# Altium PCB Button_PCB.PcbDoc
Units mm, origin at the board's own origin, x right, y up, seen from the top; angles counter-clockwise.
Board outline 35 x 40 mm, 2 copper layers (Top Layer, Bottom Layer); 38 components, 28 nets, 162 pads, 26 vias.
Unrouted connection lines stored in the file: 7.
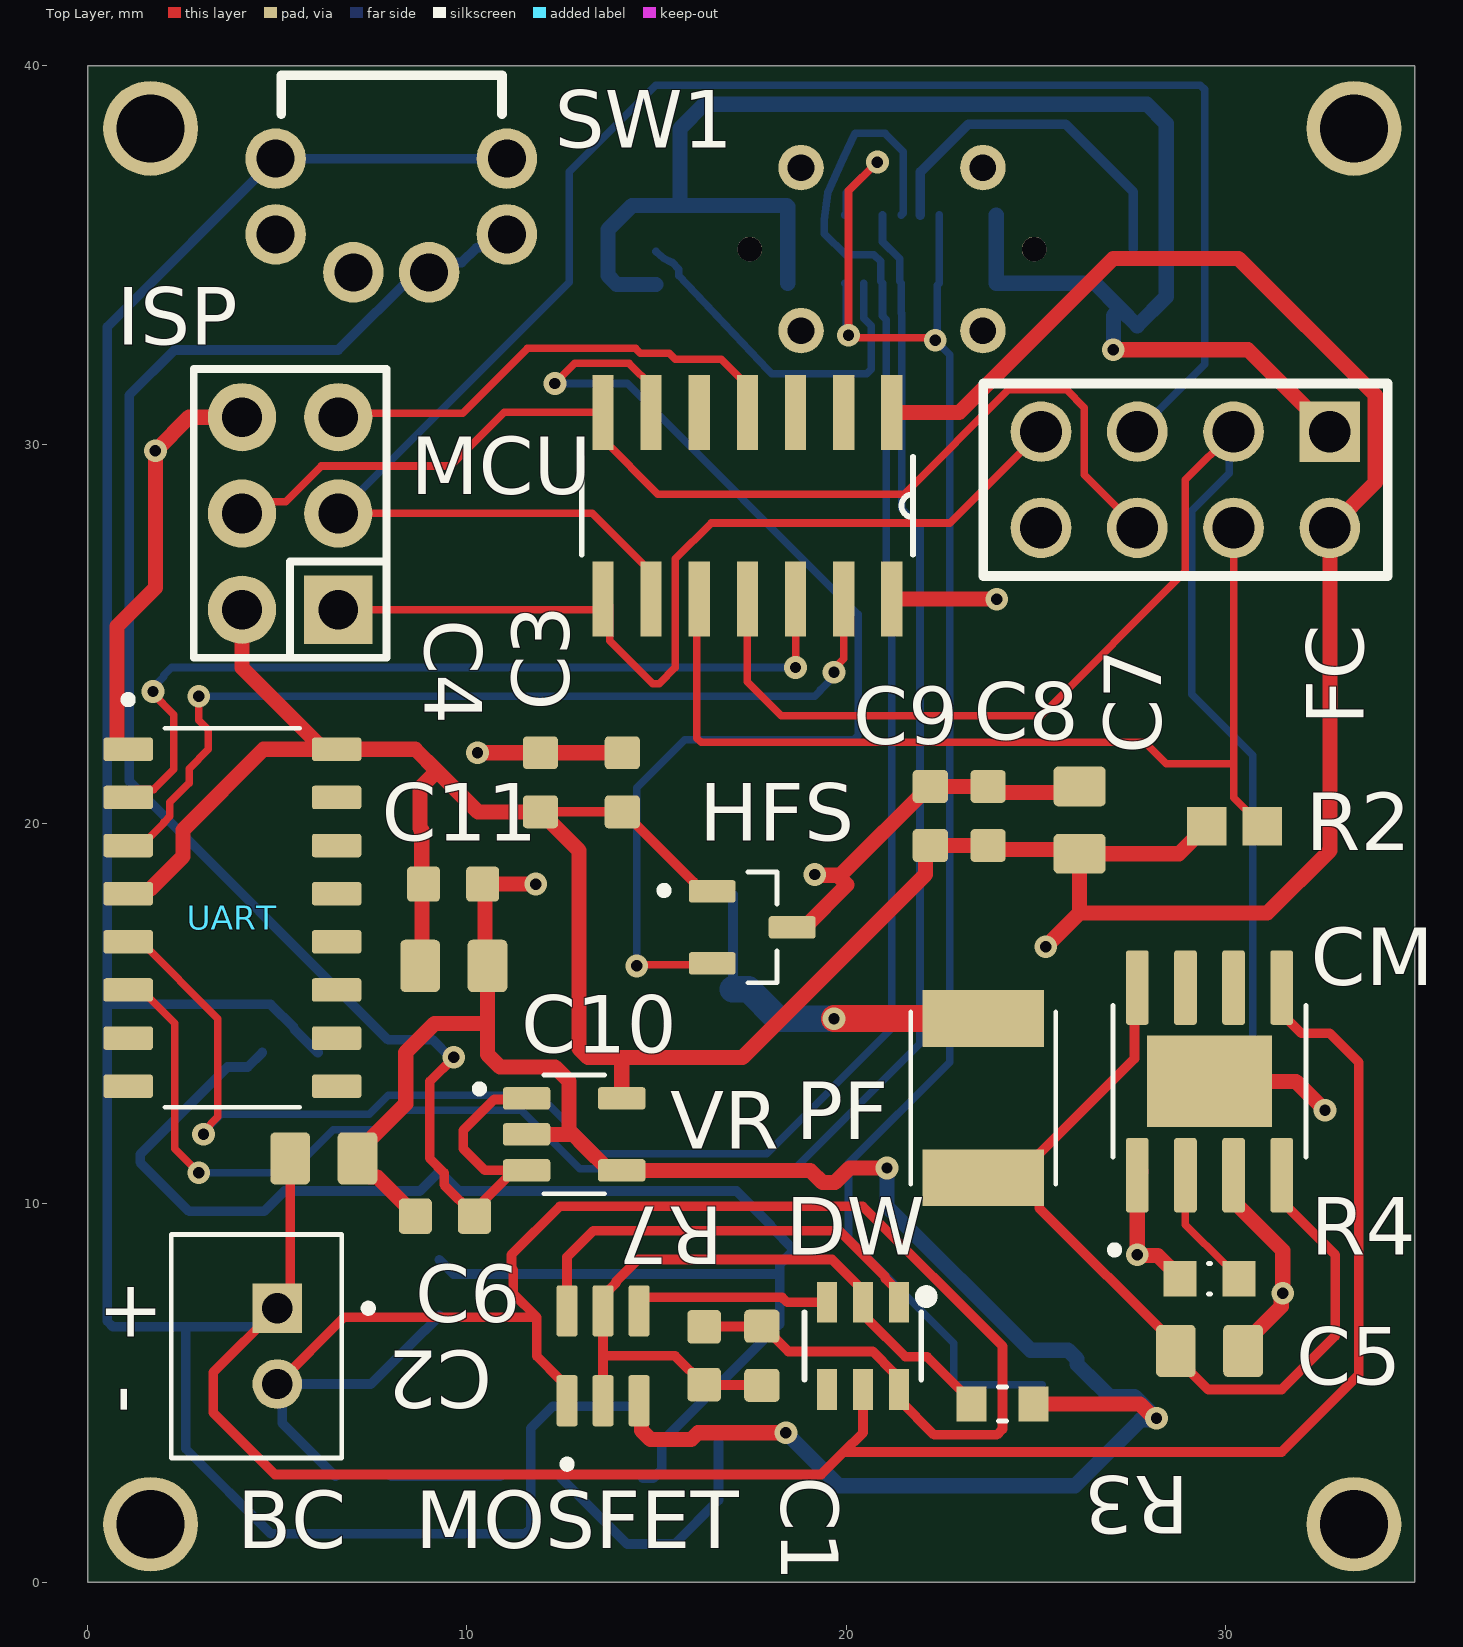
[diagram p0: Top Layer view]
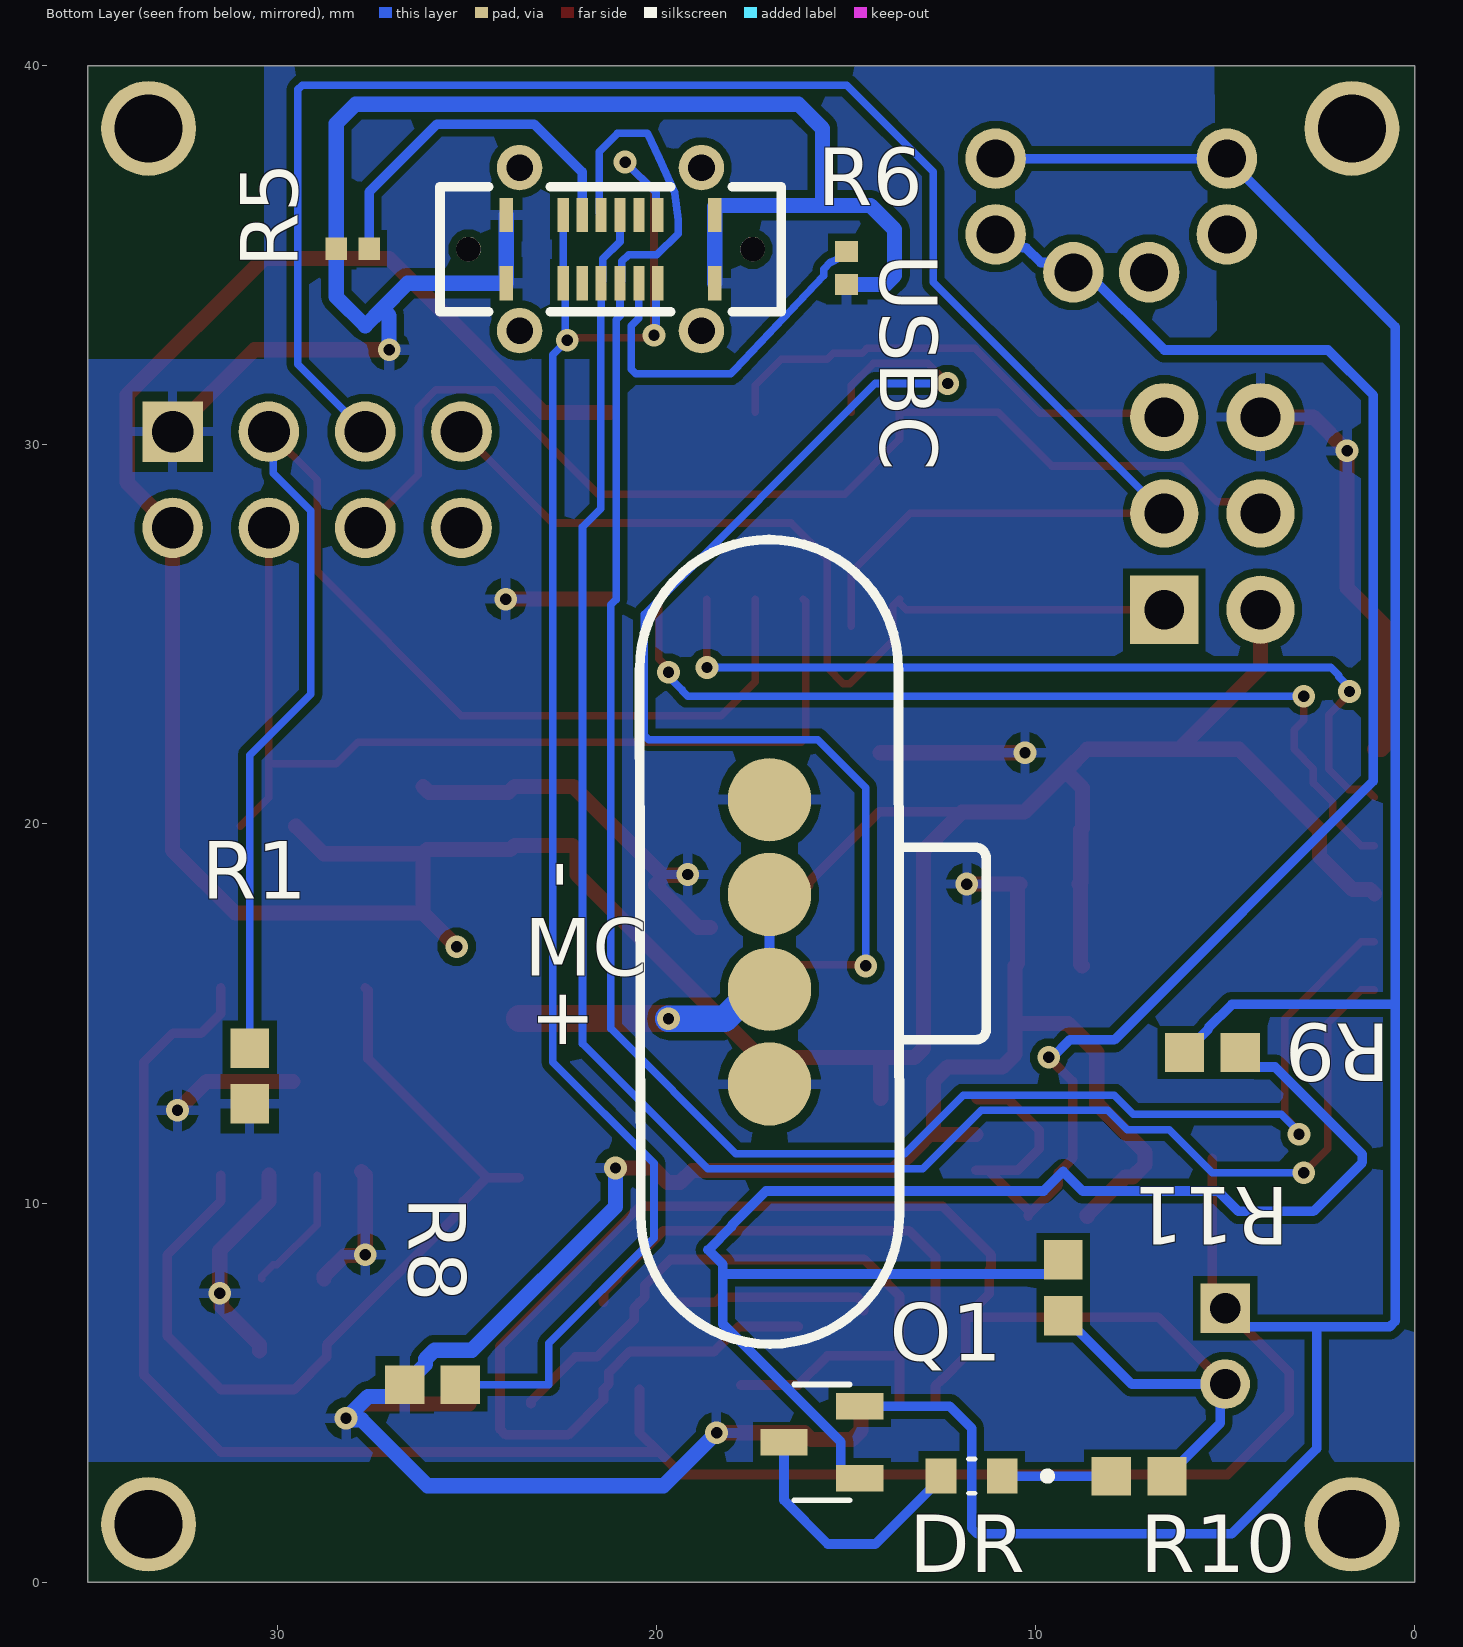
[diagram p1: Bottom Layer view, seen from below]
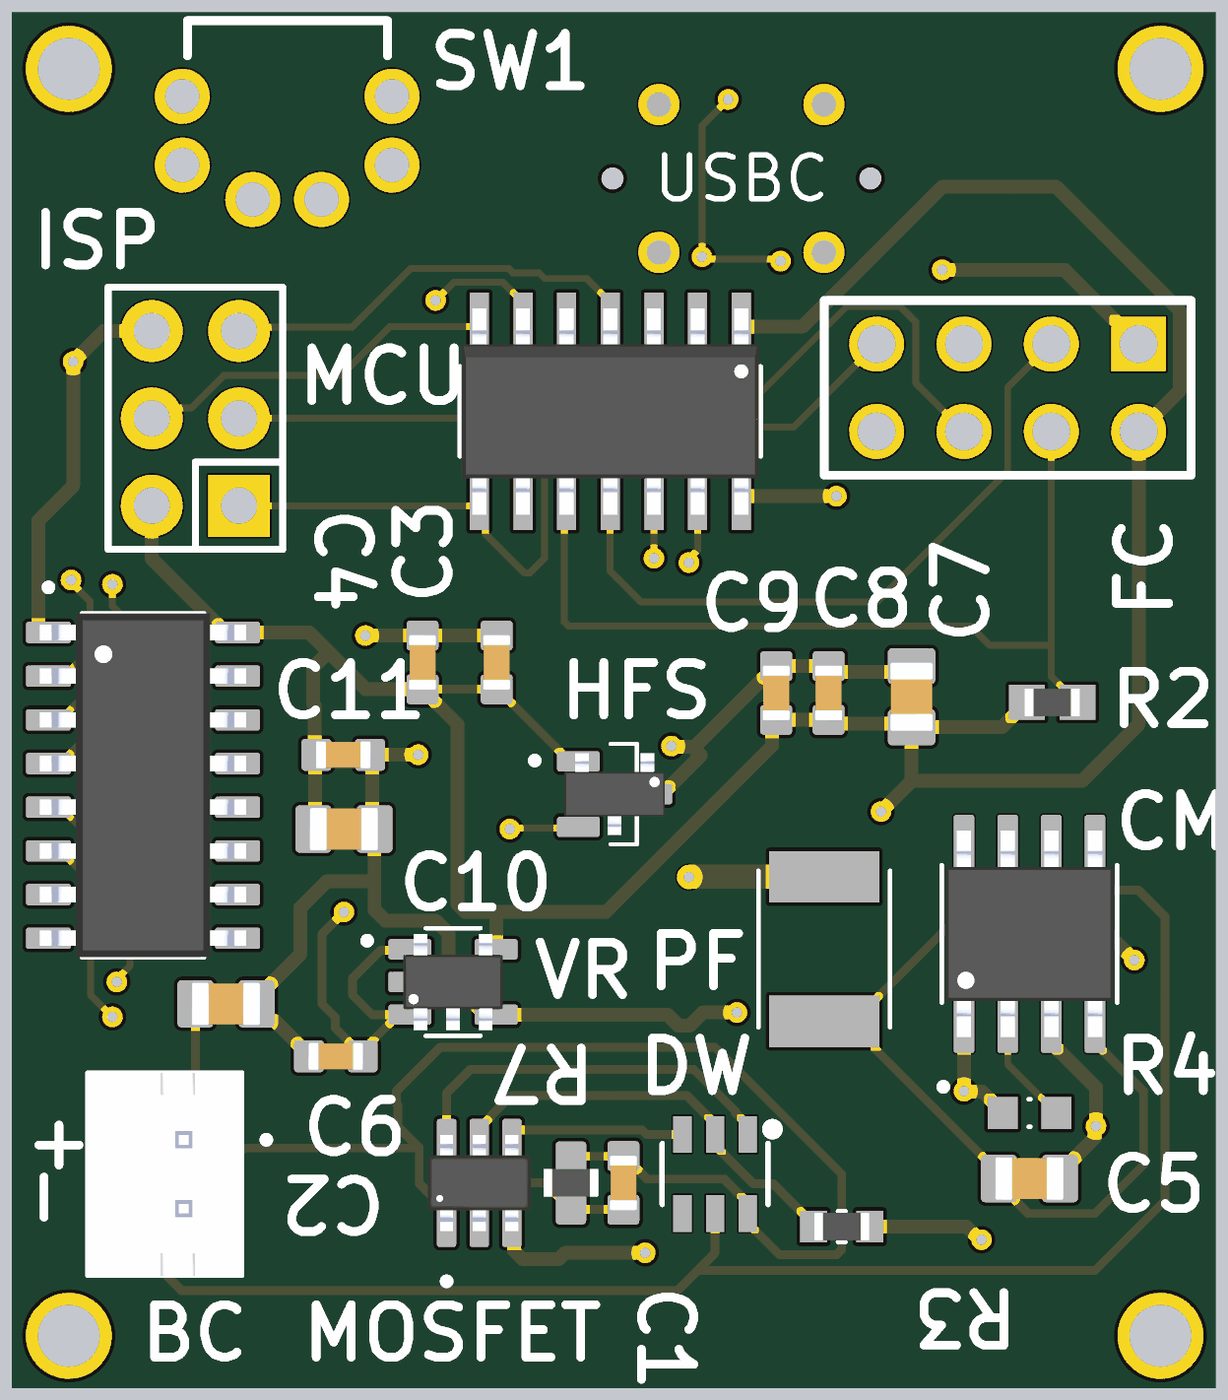
[diagram p2: 3D render of the assembled board from above, using the file's embedded part models]
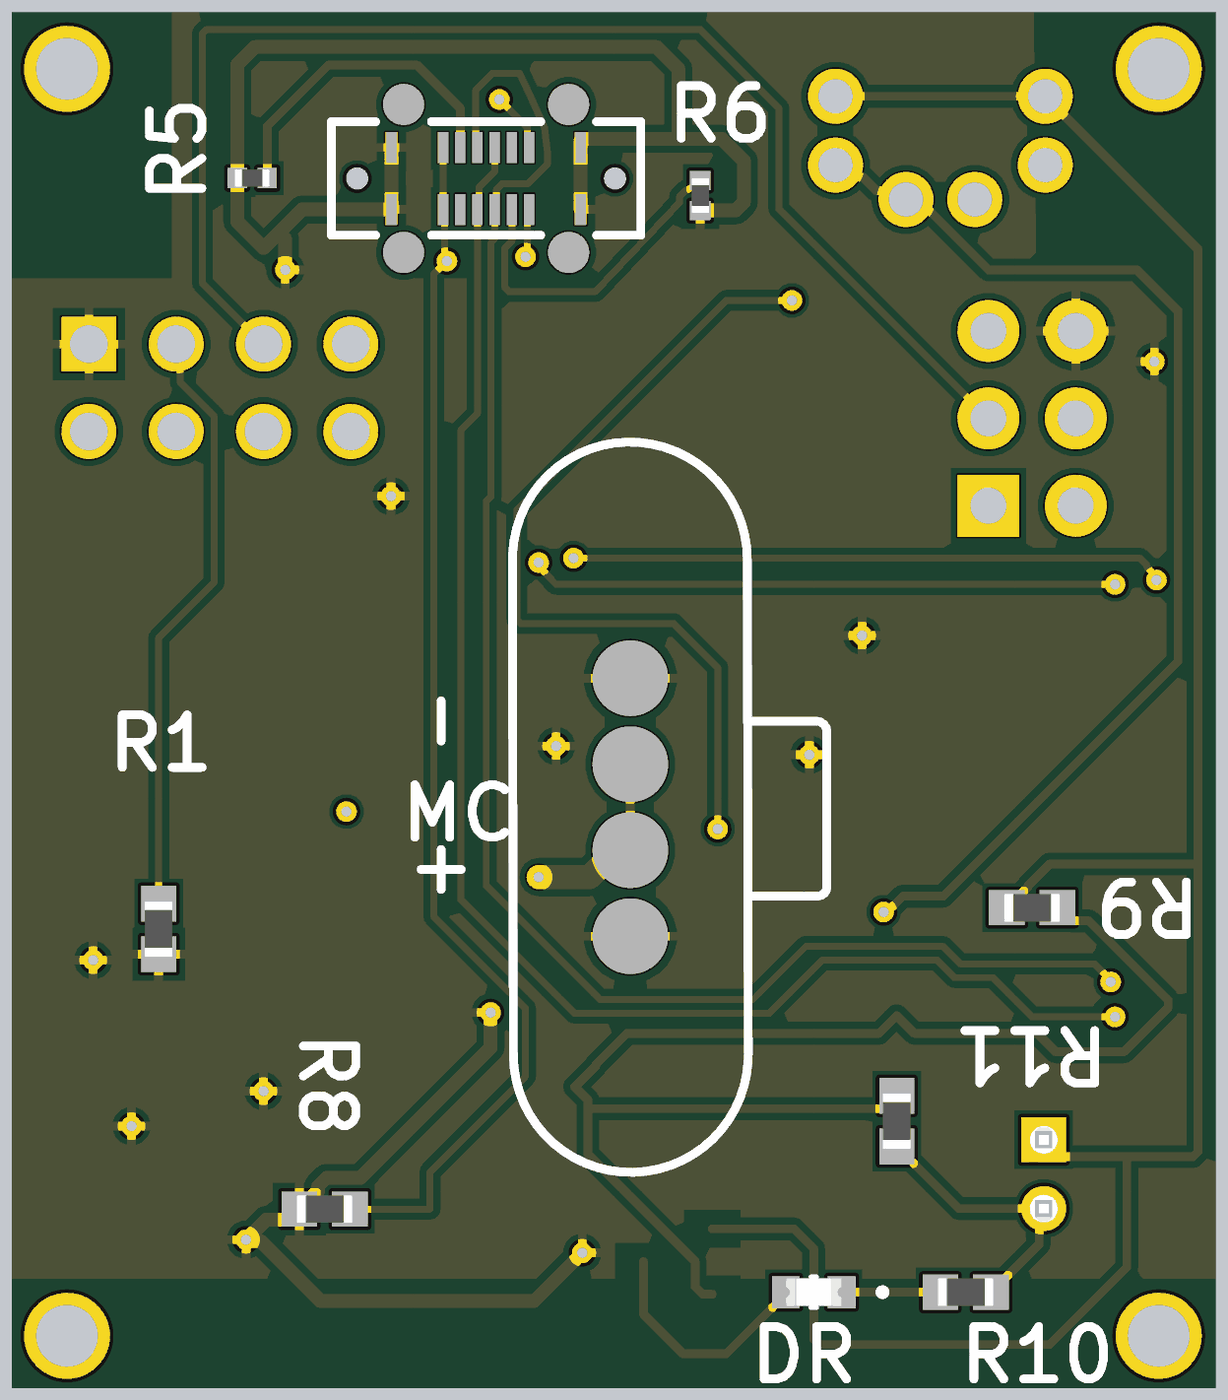
[diagram p3: 3D render of the assembled board from below, using the file's embedded part models]

## Layer stack, top to bottom
Top Solder: solder mask 0.0102, Solder Resist, Dk 3.5
Top Layer: signal copper 0.0356
Dielectric 1: dielectric 0.32, FR-4, Dk 4.8
Bottom Layer: signal copper 0.0356
Bottom Solder: solder mask 0.0102, Solder Resist, Dk 3.5

## Board outline
0,0 35,0 35,40 0,40

## Design rules (kind name [scope] priority, off if disabled: settings)
Clearance [All] p1: gap=0.2 ignorepadtopadclearanceinfootprint=TRUE
HoleSize [All] p1: absolutevalues=TRUE maxlimit=2.54 minlimit=0.25 maxpercent=80.000 minpercent=20.000
MinimumSolderMaskSliver [All] p1: minsoldermaskwidth=0.1
PolygonConnect [All] p1: connectstyle=Relief reliefconductorwidth=0.254 reliefentries=4 polygonreliefangle="90 Angle" airgapwidth=0.254
RoutingVias [All] p1: holewidth=0.711 width=1.27 viastyle="Through Hole" minholewidth=0.711 minwidth=1.27 maxholewidth=0.711 maxwidth=1.27
SilkToSolderMaskClearance [IsPad] p1: minsilkscreentomaskgap=0.15 clearancetoexposedcopper=TRUE
SolderMaskExpansion [All] p1: expansion=0.102 istentingtop=FALSE
SupplyNets "Schematic Supply Nets" [InNet('GND')] p1: voltage=0.000
Width Width_3 [InNetClass('3.3V')] p1: maxlimit=1 minlimit=0.2 preferedwidth=0.4 minimp=50.000000 maximp=50.000000 favimp=50.000000
Width Width_2 [InNetClass('GND')] p2: maxlimit=0.8 minlimit=0.25 preferedwidth=0.4 minimp=50.000000 maximp=50.000000 favimp=50.000000
Width [InNetClass('HPW')] p3: maxlimit=1.8 minlimit=0.4 preferedwidth=0.7 minimp=50.000000 maximp=50.000000 favimp=50.000000
Width Width_1 [InNetClass('SIG')] p4: maxlimit=0.3 minlimit=0.15 preferedwidth=0.2 minimp=50.000000 maximp=50.000000 favimp=50.000000
27 further rules are at their usual default settings.

## Classes and differential pairs
net class HIGHPW: B+ B- C+ "VCC TP"
net class GND: GND
net class 3.3V: 3.3V
net class SIG: CC2 CE CSN "HFS OUT" MISO MOSI "PROG Pin" RESET RX SCK TX UD+ UD- VBUS

## Components (designator, comment, footprint, x,y, rotation, side; value= is the part's Value field where it differs from the comment)
BC "B2B-PH-K-S(LF)(SN)" JST_B2B-PH-K-S(LF)(SN) 4.445,6.223 r90 top locked
C1 "CL10B104KB8NNNC" CAPC1608X90N 17.78,5.969 r90 top
C2 "CL10B104KB8NNNC" CAPC1608X90N 9.416,9.652 r180 top
C3 "CL10B104KB8NNNC" CAPC1608X90N 14.097,21.1 r90 top
C4 "CL10B104KB8NNNC" CAPC1608X90N 11.938,21.1 r270 top
C5 "CL21A106KPFNNNE" CAPC2012X135N 29.59,6.096 r0 top
C6 "CL21A106KPFNNNE" CAPC2012X135N 6.223,11.176 r0 top
C7 "CL21A106KPFNNNE" CAPC2012X135N 26.162,20.103 r90 top
C8 "CL10B104KB8NNNC" CAPC1608X90N 23.749,20.211 r90 top
C9 "CL10B104KB8NNNC" CAPC1608X90N 22.225,20.211 r90 top
C10 "CL21A106KPFNNNE" CAPC2012X135N 9.653,16.256 r0 top
C11 "CL10B104KB8NNNC" CAPC1608X90N 9.634,18.415 r0 top
CM "TP4056" SOP127P600X175-9N 29.591,13.208 r90 top
DR "LTST-C190KRKT" LEDC1608X35N 11.684,2.794 r0 bottom
DW "DW01A_C2927799" SOT-23-6_L2.9-W1.6-P0.95-LS2.8-BL 20.217,6.569 r180 top
FC "2.54-2*4" HDR-TH_8P-P2.54-V-F-R2-C4-S2.54 28.956,29.083 r180 top
HFS "TMAG5231B1DQDBZR" SOT95P237X112-3N 17.526,17.272 r0 top locked
ISP "Header-Male-2.54_2x3" HDR-TH_6P-P2.54-V-M-R2-C3-S2.54-1 5.334,28.194 r90 top
MC "YZ92015035T-04025-01" CONN-SMD_4P-P2.50_YZ92015035T-04025-01 15.875,16.891 r90 bottom
MCU "ATTINY84A-SSUR" SOIC127P600X175-14N 17.399,28.397 r270 top
MOSFET "8205A" SOT95P285X140-6N 13.589,5.969 r90 top
PF "MF-MSMF110-2" FUSER_MF-MSMF110-2 23.622,12.768 r90 top
Q1 "SS8550_C8542" SOT-23-3_L2.9-W1.3-P1.90-LS2.4-BR 446.234,425.247 r180 bottom
R1 "RC0603FR-07100KL" RESC1607X60N 30.734,13.353 r90 bottom
R2 "RC0603FR-0710KL" RESC1607X60N 30.253,19.939 r0 top
R3 "RC0603FR-071K1L" RESC1608X55N#1 24.13,4.699 r180 top
R4 "RC0603FR-071K1L" RESC1608X55N#2 29.591,8.001 r0 top
R5 "0402WGF5101TCE" RESC1005X40N 28.013,35.179 r180 bottom
R6 "0402WGF5101TCE" RESC1005X40N 14.986,34.671 r270 bottom
R7 "SMD-RES-2.7K-1%-1/10W(0603)" R0603 16.256,5.969 r180 top
R8 "RC0603FR-07100KL" RESC1607X60N 25.908,5.207 r180 bottom
R9 "RC0603FR-0722KL" RESC1607X60N 5.334,13.97 r0 bottom
R10 "RC0603FR-071K5L" RESC1607X60N 7.266,2.794 r180 bottom
R11 "RC0603FR-07100KL" RESC1607X60N 9.271,7.765 r270 bottom
SW1 "XKB5858-Z-E" SW-TH_XKB5858-Z-E 8.001,39.37 r0 top
UART "CH340C" SOIC127P600X180-16N 3.81,17.526 r0 top
USBC "GT-USB-7055BB" USB-C-TH_GT-USB-7055BB 21.213,35.168 r180 bottom
VR "TPS78233DDCT" SOT95P280X110-5N 12.827,11.811 r0 top

## Footprints (in the part's own frame and the unit in brackets; to place one, negate y for a bottom-side part, rotate by r counter-clockwise, add the part's x,y. Pads: shape width x height; smd on the part's side, far side on the other; paste and mask are expansions set on the pad)
CAPC1608X90N [mm]
  rrect25% 0.87x0.93 smd: 1(-0.78,0) 2(0.78,0)
  body extent -0.8,-0.4 0.8,0.4, height 0.9
CAPC2012X135N [mm]
  rrect25% 1.05x1.38 smd: 1(-0.888,0) 2(0.888,0)
  body extent -1,-0.63 1,0.63, height 1.35
CONN-SMD_4P-P2.50_YZ92015035T-04025-01 [mm]
  round 2.2 smd paste+0 mask+0.05: 1(-3.75,1.143) 2(-1.25,1.143) 3(1.25,1.143) 4(3.75,1.143)
  silkscreen extent -10.61,-4.57 10.61,4.57
FUSER_MF-MSMF110-2 [mm]
  rect 1.5x3.2 smd: 1(-2.1,0) 2(2.1,0)
  silkscreen extent -2.28,-1.91 2.27,1.91
HDR-TH_6P-P2.54-V-M-R2-C3-S2.54-1 [mm]
  rect 1.8x1.8 hole 1.05 paste-2539.97 mask+0.051: 1(-2.54,-1.27)
  round 1.8 hole 1.05 paste-2539.97 mask+0.051: 2(-2.54,1.27) 3(0,-1.27) 4(0,1.27) 5(2.54,-1.27) 6(2.54,1.27)
  silkscreen extent -3.81,-2.54 3.81,2.54
HDR-TH_8P-P2.54-V-F-R2-C4-S2.54 [mm]
  rect 1.6x1.6 hole 1.1 paste-2539.97 mask+0.051: 1(-3.81,-1.27)
  round 1.6 hole 1.1 paste-2539.97 mask+0.051: 2(-3.81,1.27) 3(-1.27,-1.27) 4(-1.27,1.27) 5(1.27,-1.27) 6(1.27,1.27) 7(3.81,-1.27) 8(3.81,1.27)
  silkscreen extent -5.33,-2.54 5.33,2.54
JST_B2B-PH-K-S(LF)(SN) [mm]
  rect 1.308x1.308 / inner round 1.308 / far side rect 1.308x1.308 hole 0.8: 1(1,-0.55)
  round 1.308 hole 0.8: 2(-1,-0.55)
  silkscreen extent -2.95,-3.05 2.95,2.25, body extent -2.95,-2.25 2.95,2.25, height 6
LEDC1608X35N [mm]
  rect 0.81x0.93 smd: A(0.81,0) C(-0.81,0)
  silkscreen extent -2.1,-0.45 0.09,0.45, body extent -0.8,-0.4 0.8,0.4, height 0.8
R0603 [mil]
  rrect25% 35x35 smd: 1(0,30) 2(0,-30)
  body extent -31,-16 31,16, height 22
RESC1005X40N [mm]
  rect 0.56x0.6 smd: 1(-0.435,0) 2(0.435,0)
  body extent -0.5,-0.25 0.5,0.25, height 0.35
RESC1607X60N [mm]
  rect 1.04x1.02 smd: 1(-0.735,0) 2(0.735,0)
  body extent -0.8,-0.4 0.8,0.4, height 0.55
RESC1608X55N#1 [mm]
  rect 0.79x0.93 smd: 1(-0.82,0) 2(0.82,0)
  silkscreen extent -0.11,-0.45 0.11,0.45, body extent -0.8,-0.4 0.8,0.4, height 0.55
RESC1608X55N#2 [mm]
  rect 0.87x0.93 smd paste+0 mask+0.102: 1(-0.78,0) 2(0.78,0)
  silkscreen extent -0.02,-0.4 0.02,0.4
SOIC127P600X175-14N [mil]
  rect 78x22 smd: 1(-97,150) 2(-97,100) 3(-97,50) 4(-97,0) 5(-97,-50) 6(-97,-100) 7(-97,-150) 8(97,-150) 9(97,-100) 10(97,-50) 11(97,0) 12(97,50) 13(97,100) 14(97,150)
  silkscreen extent -51,-172 51,172, body extent -118,-170 118,170, height 69
SOIC127P600X180-16N [mm]
  rrect25% 1.31x0.62 smd: 1(-2.75,4.445) 2(-2.75,3.175) 3(-2.75,1.905) 4(-2.75,0.635) 5(-2.75,-0.635) 6(-2.75,-1.905) 7(-2.75,-3.175) 8(-2.75,-4.445) 9(2.75,-4.445) 10(2.75,-3.175) 11(2.75,-1.905) 12(2.75,-0.635) 13(2.75,0.635) 14(2.75,1.905) 15(2.75,3.175) 16(2.75,4.445)
  silkscreen extent -2.85,-5 1.78,5.85, body extent -3,-5 3,5, height 1.8
SOP127P600X175-9N [mm]
  rrect25% 1.97x0.6 smd mask+0.051: 1(-2.475,1.905) 2(-2.475,0.635) 3(-2.475,-0.635) 4(-2.475,-1.905) 5(2.475,-1.905) 6(2.475,-0.635) 7(2.475,0.635) 8(2.475,1.905)
  rect 2.413x3.302 smd paste-3 mask+0.051: 9(0,0)
  silkscreen extent -4.54,-2.55 2,2.6, body extent -3,-2.45 3,2.45, height 1.75
SOT95P237X112-3N [mm]
  rrect25% 1.24x0.59 smd: 1(-1.055,0.95) 2(-1.055,-0.95) 3(1.055,0)
  silkscreen extent -2.42,-1.46 0.65,1.46, body extent -1.18,-1.46 1.18,1.46, height 1.12
SOT95P280X110-5N [mm]
  rrect25% 1.25x0.59 smd: 1(-1.255,0.95) 2(-1.255,0) 3(-1.255,-0.95) 4(1.255,-0.95) 5(1.255,0.95)
  silkscreen extent -2.6,-1.56 0.8,1.56, body extent -1.45,-1.4 1.45,1.4, height 1.1
SOT95P285X140-6N [mm]
  rrect25% 1.35x0.56 smd: 1(-1.185,0.95) 2(-1.185,0) 3(-1.185,-0.95) 4(1.185,-0.95) 5(1.185,0) 6(1.185,0.95)
  silkscreen extent -2.96,0.85 -2.76,1.05, body extent -1.4,-1.5 1.4,1.5, height 1.4
SOT-23-3_L2.9-W1.3-P1.90-LS2.4-BR [mm]
  rect 1.25x0.7 smd paste+0 mask+0.051: 1(431.596,-422.514) 2(431.596,-420.614) 3(429.597,-421.564)
  silkscreen extent 429.87,-423.09 431.32,-420.04
SOT-23-6_L2.9-W1.6-P0.95-LS2.8-BL [mm]
  rect 0.532x1.072 smd paste+0 mask+0.051: 1(-1.18,-0.809) 2(-0.23,-0.809) 3(0.72,-0.809) 4(0.72,1.489) 5(-0.23,1.489) 6(-1.18,1.489)
  silkscreen extent -2.05,-1.11 1.31,1.23
SW-TH_XKB5858-Z-E [mm]
  round 1.6 hole 1 paste-2539.97 mask+0.051: 1(-3.05,-1.813) 2(-3.05,-3.813) 3(3.05,-1.813) 4(3.05,-3.813) 5(-1,-4.813) 6(1,-4.813)
  silkscreen extent -2.9,-0.64 2.92,0.39
USB-C-TH_GT-USB-7055BB [mm]
  round 1.2 hole 0.7 paste-2539.97 mask+0.05: 17(-2.4,-2.15) 17(-2.4,2.15) 17(2.4,-2.15) 17(2.4,2.15)
  rect 0.35x0.9 smd paste-100 mask+0.05: A1(-2.75,0.9) A12(2.75,0.9) B1(2.75,-0.9) B12(-2.75,-0.9)
  rect 0.3x0.9 smd paste-100 mask+0.05: A4(-1.25,0.9) A5(-0.75,0.9) A6(-0.25,0.9) A7(0.25,0.9) A8(0.75,0.9) A9(1.25,0.9) B4(1.25,-0.9) B5(0.75,-0.9) B6(0.25,-0.9) B7(-0.25,-0.9) B8(-0.75,-0.9) B9(-1.25,-0.9)
  round 0.65 hole 0.65 unplated paste-2539.97: ""(-3.75,0) ""(3.75,0)
  silkscreen extent -4.5,-1.65 4.5,1.65

## Part data
BC: "Connector Header Through Hole 2 position 0.079 (2.00mm)", Package=None, Check_prices=https://www.snapeda.com/parts/B2B-PH-K-S%20(LF)(SN)/JST/view-part/?ref=eda, MF=JST, MP="B2B-PH-K-S (LF)(SN)", SnapEDA_Link=https://www.snapeda.com/parts/B2B-PH-K-S%20(LF)(SN)/JST/view-part/?ref=snap
C1 C2 C3 C4 C8 C9 C11: "0.1 ÂµF Â±10% 50V Ceramic Capacitor X7R 0603 (1608 Metric)", Package="SMD-2 Samsung", Check_prices=https://www.snapeda.com/parts/CL10B104KB8NNNC/Samsung/view-part/?ref=eda, MF="Samsung Electro-Mechanics", MP=CL10B104KB8NNNC, SnapEDA_Link=https://www.snapeda.com/parts/CL10B104KB8NNNC/Samsung/view-part/?ref=snap
C5 C6 C7 C10: "10 ÂµF Â±10% 10V Ceramic Capacitor X5R 0805 (2012 Metric)", Package="SMD-2 Samsung", Check_prices=https://www.snapeda.com/parts/CL21A106KPFNNNE/Samsung/view-part/?ref=eda, MF=Samsung, MP=CL21A106KPFNNNE, SnapEDA_Link=https://www.snapeda.com/parts/CL21A106KPFNNNE/Samsung/view-part/?ref=snap
CM: "Complete single cell Li-Ion battery with a constant current / constant voltage linear charger", Package=Package, Availability="Not in stock", Check_prices=https://www.snapeda.com/parts/TP4056/NanJing+Top+Power+ASIC+Corp./view-part/?ref=eda, MF="NanJing Top Power ASIC Corp.", MP=TP4056, Price=None, SnapEDA_Link=https://www.snapeda.com/parts/TP4056/NanJing+Top+Power+ASIC+Corp./view-part/?ref=snap
DR: "Red 631nm LED Indication - Discrete 2V 0603 (1608 Metric)", Package="0603 Lite-On", Availability="In Stock", Check_prices=https://www.snapeda.com/parts/LTST-C190KRKT/Lite-On+Inc./view-part/?ref=eda, MF="Lite-On Inc.", MP=LTST-C190KRKT, Price=None, Purchase-URL=https://pricing.snapeda.com/search/part/LTST-C190KRKT/?ref=eda, SnapEDA_Link=https://www.snapeda.com/parts/LTST-C190KRKT/Lite-On+Inc./view-part/?ref=snap
HFS: "Low-power, low-voltage (1.65 V to 5.5 V) Hall-effect switch", Package="SOT-23 Texas Instruments", Check_prices=https://www.snapeda.com/parts/TMAG5231B1DQDBZR/Texas+Instruments/view-part/?ref=eda, MF="Texas Instruments", MP=TMAG5231B1DQDBZR, SnapEDA_Link=https://www.snapeda.com/parts/TMAG5231B1DQDBZR/Texas+Instruments/view-part/?ref=snap
MCU: "AVR AVRÂ® ATtiny Microcontroller IC 8-Bit 20MHz 8KB (4K x 16) FLASH 14-SOIC", Package="SOIC-14 Microchip", Check_prices=https://www.snapeda.com/parts/ATTINY84A-SSUR/Microchip/view-part/?ref=eda, MF="Microchip Technology", MP=ATTINY84A-SSUR, SnapEDA_Link=https://www.snapeda.com/parts/ATTINY84A-SSUR/Microchip/view-part/?ref=snap
MOSFET: "Mosfet Array 20V 5A 830mW (Ta) Surface Mount SOT-23-6", Package="SOT-23-6 UMW", Check_prices=https://www.snapeda.com/parts/8205A/UMW/view-part/?ref=eda, MF=UMW, MP=8205A, SnapEDA_Link=https://www.snapeda.com/parts/8205A/UMW/view-part/?ref=snap
PF: "Polymeric PTC Resettable Fuse 6V 1.1 A Ih Surface Mount 1812 (4532 Metric), Concave", Package="1812 Bourns", Availability="In Stock", Check_prices=https://www.snapeda.com/parts/MF-MSMF110-2/Bourns/view-part/?ref=eda, MF=Bourns, MP=MF-MSMF110-2, Price=None, Purchase-URL=https://pricing.snapeda.com/search/part/MF-MSMF110-2/?ref=eda, SnapEDA_Link=https://www.snapeda.com/parts/MF-MSMF110-2/Bourns/view-part/?ref=snap
R1 R8 R11: "100 kOhms Â±1% 0.1W, 1/10W Chip Resistor 0603 (1608 Metric) Moisture Resistant Thick Film", Package="0603 Yageo", Check_prices=https://www.snapeda.com/parts/RC0603FR-07100KL/Yageo/view-part/?ref=eda, MF=Yageo, MP=RC0603FR-07100KL, SnapEDA_Link=https://www.snapeda.com/parts/RC0603FR-07100KL/Yageo/view-part/?ref=snap
R2: "10 kOhms Â±1% 0.1W, 1/10W Chip Resistor 0603 (1608 Metric) Moisture Resistant Thick Film", Package="0603 Yageo", Check_prices=https://www.snapeda.com/parts/RC0603FR-0710KL/Yageo/view-part/?ref=eda, MF=Yageo, MP=RC0603FR-0710KL, SnapEDA_Link=https://www.snapeda.com/parts/RC0603FR-0710KL/Yageo/view-part/?ref=snap
R3 R4: "1.1 kOhms Â±1% 0.1W, 1/10W Chip Resistor 0603 (1608 Metric) Moisture Resistant Thick Film", Package="1608 Yageo", Check_prices=https://www.snapeda.com/parts/RC0603FR-071K1L/Yageo/view-part/?ref=eda, MF=Yageo, MP=RC0603FR-071K1L, SnapEDA_Link=https://www.snapeda.com/parts/RC0603FR-071K1L/Yageo/view-part/?ref=snap
R5 R6: "5.1K Ohm 1/16W Thick Film Resistor 0402 Chip - Surface Mount", Package=None, Check_prices=https://www.snapeda.com/parts/0402WGF5101TCE/Uni-Royal/view-part/?ref=eda, MF=Uni-Royal, MP=0402WGF5101TCE, SnapEDA_Link=https://www.snapeda.com/parts/0402WGF5101TCE/Uni-Royal/view-part/?ref=snap
R7: "2.7 kOhms Â±1% 0.1W, 1/10W Chip Resistor 0603 (1608 Metric) Moisture Resistant Thick Film", Package="0603 Yageo", Check_prices=https://www.snapeda.com/parts/RC0603FR-072K7L/Yageo/view-part/?ref=eda, MF=Yageo, MP=RC0603FR-072K7L, SnapEDA_Link=https://www.snapeda.com/parts/RC0603FR-072K7L/Yageo/view-part/?ref=snap
R9: "22 kOhms Â±1% 0.1W, 1/10W Chip Resistor 0603 (1608 Metric) Moisture Resistant Thick Film", Package="0603 Yageo", Check_prices=https://www.snapeda.com/parts/RC0603FR-0722KL/Yageo/view-part/?ref=eda, MF=Yageo, MP=RC0603FR-0722KL, SnapEDA_Link=https://www.snapeda.com/parts/RC0603FR-0722KL/Yageo/view-part/?ref=snap
R10: "1.5 kOhms Â±1% 0.1W, 1/10W Chip Resistor 0603 (1608 Metric) Moisture Resistant Thick Film", Package="0603 Yageo", Check_prices=https://www.snapeda.com/parts/RC0603FR-071K5L/Yageo/view-part/?ref=eda, MF=Yageo, MP=RC0603FR-071K5L, SnapEDA_Link=https://www.snapeda.com/parts/RC0603FR-071K5L/Yageo/view-part/?ref=snap
UART: "USB to serial chip CH340", Package=None, Availability="Not in stock", Check_prices=https://www.snapeda.com/parts/CH340C/WCH/view-part/?ref=eda, MF=WCH, MP=CH340C, Price=None, SnapEDA_Link=https://www.snapeda.com/parts/CH340C/WCH/view-part/?ref=snap
VR: "150-mA, nano-IQ, low-dropout voltage regulator with enable from -40Â°C to +125Â°C", Package="SOT-23-THN-5 Texas Instruments", Availability="In Stock", Check_prices=https://www.snapeda.com/parts/TPS78233DDCT/Texas+Instruments/view-part/?ref=eda, MF="Texas Instruments", MP=TPS78233DDCT, Price=None, Purchase-URL=https://pricing.snapeda.com/search/part/TPS78233DDCT/?ref=eda, SnapEDA_Link=https://www.snapeda.com/parts/TPS78233DDCT/Texas+Instruments/view-part/?ref=snap
MC: Add into BOM=yes, Convert to PCB=yes, Device=YZ92015035T-04025-01, Symbol=YZ92015035T-04025-01

## Free pads (board coordinates)
  round 2.5 hole 1.8: 1(1.651,1.524) 3(33.401,1.524)
  round 2.5 hole 1.8 unplated: 2(1.651,38.354) 4(33.401,38.354)

## Via types
v1: diameter 0.6, hole 0.3, Top Layer to Bottom Layer, 26 vias

## Nets (pads, with @x,y where several pads share a name; then routed paths per layer and width w, separated by ;. In a path a pad name is that pad's centre, name@x,y a point inside that pad or via, vN(x,y) a via of type N, cw(c..) or ccw(c..) an arc to the next point about the centre after c; other vN are vias at no path point)
3.3V: C3.1 C4.2 C7.1 C8.1 C9.1 C10.1 C11.1 FC.2 HFS.1 ISP.2 MCU.1 R2.1 UART.4 UART.16 VR.5 | length 95.1
  Top Layer w0.254: C4.2 C3.1 14.127,20.32 15.978,18.469 15.978,18.39 16.146,18.222 HFS.1
  Top Layer w0.4: UART.4 1.17,18.271 1.634,18.271 2.506,19.143 2.506,19.844 4.633,21.971 UART.16@6.215,21.971 ; ISP.2 4.064,24.122 UART.16@6.215,21.971 ; C10.1 8.809,16.301 8.809,18.37 C11.1 8.806,18.463 8.806,19.844 8.762,19.889 8.762,20.954 9.207,21.399 ; C4.2@11.908,20.32 10.287,20.32 9.207,21.399 ; C4.2 12.954,19.304 12.954,14.077 13.188,13.843 14.097,13.843 ; VR.5 14.082,13.828 14.097,13.843 ; MCU.1 22.987,30.861 27.051,34.925 30.36,34.925 33.966,31.319 33.966,29.013 FC.2 32.893,27.686 32.766,27.559 32.766,19.304 31.115,17.653 26.162,17.653 ; v1(25.273,16.764) 26.162,17.653 ; R2.1 29.508,19.939 28.784,19.215 C7.1 ; UART.16@6.215,21.971 UART.16 8.636,21.971 9.207,21.399 ; 14.097,13.843 17.272,13.843 22.1,18.671 22.1,19.306 C9.1 C8.1 23.857,19.323 26.054,19.323 C7.1 ; 26.162,17.653 C7.1
  Bottom Layer w0.4: v1@25.254,16.745 v1(25.273,16.764)
B: Q1.1 R9.1 R11.1 | length 40.6
  Bottom Layer w0.254: R9.1 4.216,13.587 3.681,13.587 1.375,11.281 1.375,11.071 2.667,9.779 4.645,9.779 5.184,10.317 8.757,10.317 9.271,10.832 9.785,10.317 17.11,10.317 18.019,9.408 18.019,9.376 18.632,8.763 ; R11.1 9.643,8.128 18.249,8.128 ; Q1.1 14.912,2.733 15.135,2.956 15.135,3.694 18.249,6.807 18.249,8.128 ; 18.642,8.763 18.632,8.763 ; 18.249,8.128 18.249,8.38 18.632,8.763
B+: BC.1 C6.1 CM.5 DW.5 Q1.2 R9.2 SW1.1 SW1.3 | length 121
  Top Layer w0.254: BC.1 3.302,5.53 3.302,4.467 4.933,2.836 19.346,2.836 19.939,3.429 ; C6.1 5.336,11.175 BC.1@5.336,7.564 ; DW.5 20.447,3.937 19.939,3.429 ; CM.5 31.496,14.998 32.016,14.478 32.766,14.478 33.528,13.716 33.528,5.461 31.496,3.429 19.939,3.429
  Bottom Layer w0.254: BC.1 4.503,6.731 2.58,6.731 ; R9.2 6.059,13.97 5.446,14.583 5.446,14.615 4.821,15.24 0.508,15.24 ; SW1.3 SW1.1 0.508,33.114 0.508,15.24 ; Q1.2 12.258,4.633 11.684,4.059 11.684,1.419 11.535,1.27 4.826,1.27 2.58,3.516 2.58,6.731 ; 0.508,15.24 0.508,6.88 0.657,6.731 2.58,6.731
B-: BC.2 C1.2 DW.6 MOSFET.1 R7.2 R10.2 R11.2 | length 46.8
  Top Layer w0.254: BC.2 6.757,6.985 11.843,6.985 ; MOSFET.1 12.639,5.179 12.486,5.332 12.468,5.332 11.843,5.956 11.843,6.985 ; R7.2 16.265,6.74 17.771,6.74 C1.2 17.81,6.749 18.477,6.082 20.71,6.082 21.258,5.533 21.258,5.219 DW.6 21.397,4.81 22.324,3.883 23.981,3.883 24.13,4.032 24.13,6.223 20.439,9.914 12.454,9.914 11.175,8.635 11.175,8.276 11.218,8.233 11.218,7.61 11.843,6.985
  Bottom Layer w0.254: R10.2 6.521,2.794 5.127,4.188 5.127,5.091 BC.2 7.464,5.223 8.878,6.637 8.888,6.637 9.271,7.02 R11.2
C: DR.A Q1.3 | length 6.9
  Bottom Layer w0.254: DR.A 12.494,2.734 14.224,1.004 15.482,1.004 16.637,2.159 Q1.3
C+: MC.2 MC.3 PF.2 | length 9.4
  Top Layer w0.7: v1(19.685,14.859) 19.694,14.868 PF.2
  Bottom Layer w0.254: MC.2 MC.3
  Bottom Layer w0.7: MC.2 17.424,15.641 18.206,14.859 v1(19.685,14.859)
CC2: R6.1 USBC.B5 | length 9.5
  Bottom Layer w0.2: R6.1 15.186,34.926 15.41,34.816 15.586,34.64 15.586,34.471 17.932,31.986 ccw(c18.587,32.604) 17.957,31.961 18.043,31.877 20.546,31.877 20.666,31.997 20.666,33.142 20.463,33.345 USBC.B5
CE: FC.3 MCU.11 R1.2 | length 37.3
  Top Layer w0.2: MCU.11 17.399,23.749 18.288,22.86 25.146,22.86 28.956,26.67 28.956,29.083 FC.3
  Bottom Layer w0.2: FC.3 30.11,30.237 30.11,29.253 29.126,28.269 29.126,23.419 30.734,21.811 R1.2
CSN: FC.4 MCU.10 R2.2 | length 26.3
  Top Layer w0.2: MCU.10 16.066,25.87 16.066,22.269 16.183,22.152 27.886,22.152 28.448,21.59 30.226,21.59 ; FC.4 30.226,21.59 ; R2.2 30.978,19.939 30.226,20.691 30.226,21.59
GND: C2.2 C3.2 C4.1 C5.2 C6.2 C7.2 C8.2 C9.2 C10.2 C11.2 CM.1 CM.3 CM.9 FC.1 HFS.3 ISP.6 MC.1 MC.4 MCU.14 MOSFET.3 R1.1 R3.1 R4.1 R5.1 R6.2 R8.1 UART.1 USBC.A1 USBC.A12 USBC.B1 USBC.B12 VR.2 VR.4 | length 143.2
  Top Layer w0.4: UART.1 0.872,21.971 0.762,22.081 0.762,25.219 1.778,26.235 v1(1.778,29.845) 2.667,30.734 ISP.6 ; C2.2 8.636,9.682 7.632,10.686 7.436,10.686 7.111,11.011 7.111,11.341 8.382,12.612 8.382,13.97 9.144,14.732 10.541,14.732 ; v1(10.278,21.88) C4.1 C3.2 ; VR.2 12.802,11.811 ; v1(11.811,18.415) C11.2 10.477,18.351 10.477,16.319 C10.2 10.541,14.732 ; MOSFET.3 14.478,4.723 14.605,4.596 14.605,3.995 14.839,3.76 15.918,3.76 16.095,3.937 v1(18.415,3.937) ; HFS.3 18.906,17.272 20.03,18.396 19.776,18.65 ; v1(19.177,18.669) 19.196,18.65 19.854,18.65 22.195,20.991 C8.2 23.912,20.828 25.999,20.828 C7.2 ; v1(21.082,10.922) 20.089,10.922 19.708,10.541 19.377,10.541 19.057,10.861 13.752,10.861 13.091,11.522 12.802,11.811 ; MCU.14 v1(23.978,25.933) ; R3.1 27.759,4.699 28.14,4.318 v1(28.194,4.318) ; v1(27.051,32.512) 30.607,32.512 FC.1 ; CM.1@27.786,10.833 CM.1 v1(27.686,8.636) 27.705,8.617 28.225,8.617 28.771,8.071 R4.1@28.771,8.001 ; CM.9 31.877,13.208 v1(32.639,12.446) ; CM.3 30.226,10.048 31.524,8.75 v1(31.524,7.62) 31.486,7.582 31.486,7.269 30.478,6.261 C5.2 ; 10.541,14.732 10.541,13.915 10.867,13.589 12.319,13.589 12.694,13.214 12.694,11.919 12.802,11.811
  Bottom Layer w0.4: v1(10.278,21.88) v1@10.316,21.842 ; R6.2 13.95,34.236 13.716,34.47 13.716,35.687 14.351,36.322 15.621,36.322 ; v1(18.415,3.937) 19.812,2.54 26.039,2.54 27.779,4.28 28.156,4.28 v1(28.194,4.318) 27.615,4.897 26.953,4.897 R8.1 26.633,5.207 26.093,5.747 26.093,5.883 25.859,6.117 24.867,6.117 21.082,9.902 v1(21.082,10.922) ; USBC.B1 USBC.A12 18.463,36.293 18.438,36.318 18.213,36.318 18.209,36.322 15.621,36.322 ; v1@19.15,18.669 v1(19.177,18.669) ; USBC.A1 USBC.B12 26.565,34.268 27.242,33.592 ; v1(27.051,32.512) 27.062,32.523 27.062,33.412 27.242,33.592 ; 15.621,36.322 15.621,38.354 16.256,38.989 27.94,38.989 28.448,38.481 R5.1 28.448,33.909 27.686,33.147 27.242,33.592
"HFS OUT": HFS.2 MCU.6 | length 30.4
  Top Layer w0.2: v1(12.319,31.623) 12.848,32.152 14.28,32.152 14.311,32.12 14.859,31.572 MCU.6 ; v1(14.478,16.256) 14.511,16.289 16.438,16.289 HFS.2
  Bottom Layer w0.2: v1@12.446,31.623 14.224,31.623 20.32,25.527 20.32,22.342 20.203,22.225 15.748,22.225 14.478,20.955 v1(14.478,16.256)
MISO: FC.7 ISP.1 MCU.8 | length 24.5
  Top Layer w0.2: ISP.1 13.41,25.654 MCU.8@13.589,25.833 ; MCU.8 13.768,25.754 13.768,24.84 14.903,23.705 15.069,23.705 15.494,24.13 15.494,26.993 16.443,27.942 22.735,27.942 FC.7
MOSI: FC.6 ISP.4 MCU.7 | length 29.7
  Top Layer w0.2: ISP.4 4.37,28.5 5.213,28.5 6.158,29.445 9.564,29.445 10.98,30.861 MCU.7 13.589,30.15 15.037,28.702 21.535,28.702 24.286,31.453 25.824,31.453 26.289,30.988 26.289,29.21 FC.6
NetC1_1: C1.1 DW.2 MOSFET.2 MOSFET.5 R3.2 R7.1 | length 19.4
  Top Layer w0.254: MOSFET.2 13.589,5.969 ; C1.1 17.771,5.198 16.265,5.198 R7.1 15.494,5.969 13.589,5.969 ; R3.2 23.31,4.769 22.136,5.943 21.568,5.943 20.586,6.925 20.586,7.239 DW.2 20.308,7.517 20.308,7.831 19.63,8.509 14.518,8.509 13.932,7.923 13.932,7.892 13.589,7.549 MOSFET.5 13.589,5.969
NetDR_C: DR.C R10.1 | length 2.9
  Bottom Layer w0.254: R10.1 DR.C
NetDW_1: DW.1 MOSFET.6 | length 11.4
  Top Layer w0.254: MOSFET.6 12.639,8.575 13.335,9.271 19.818,9.271 21.04,8.049 21.04,8.005 21.397,7.648 DW.1
NetDW_3: DW.3 MOSFET.4 | length 5.3
  Top Layer w0.254: MOSFET.4 14.539,7.358 14.692,7.511 18.317,7.511 18.45,7.378 DW.3
NetR5_2: R5.2 USBC.A5 | length 9.5
  Bottom Layer w0.254: USBC.A5 21.963,37.203 23.222,38.462 25.8,38.462 27.578,36.684 R5.2
"PROG Pin": CM.2 R4.2 | length 3.4
  Top Layer w0.2: CM.2 28.956,9.429 30.019,8.366 30.116,8.366 30.411,8.071 R4.2@30.411,8.001
RESET: ISP.5 MCU.4 | length 12.7
  Top Layer w0.2: ISP.5 6.71,30.84 9.885,30.84 11.597,32.552 14.445,32.552 14.577,32.42 15.332,32.42 15.494,32.258 16.713,32.258 17.399,31.572 MCU.4
RX: MCU.13 UART.3 | length 24.3
  Top Layer w0.2: UART.3 1.405,19.431 2.006,20.032 2.006,20.051 2.159,20.205 2.159,20.574 2.667,21.082 2.667,21.463 3.175,21.971 3.175,22.488 2.921,22.742 v1(2.921,23.368) ; v1(19.685,24.003) 19.685,24.111 19.939,24.365 MCU.13
  Bottom Layer w0.2: v1(2.921,23.368) 19.177,23.368 19.326,23.517 19.326,23.535 19.685,23.895 v1(19.685,24.003)
SCK: FC.5 ISP.3 MCU.9 | length 49.4
  Top Layer w0.2: ISP.3 13.31,28.194 14.859,26.645 MCU.9 MCU.9@14.859,25.222
  Bottom Layer w0.2: ISP.3 12.7,34.29 12.7,37.211 14.986,39.497 29.347,39.497 29.464,39.38 29.464,32.131 FC.5
SW: C2.1 SW1.4 SW1.6 VR.1 VR.3 | length 44.5
  Top Layer w0.254: v1(9.652,13.843) 9.017,13.208 9.017,11.176 9.398,10.795 9.398,10.48 10.196,9.682 C2.1 ; C2.1@10.16,9.779 VR.3@11.242,10.861 ; VR.3 VR.3@11.242,10.861 ; VR.1 11.541,12.73 10.715,12.73 9.906,11.921 9.906,11.43 10.475,10.861 VR.3@11.242,10.861
  Bottom Layer w0.254: SW1.6 8.649,34.557 6.599,32.507 2.281,32.507 1.089,31.315 1.089,21.136 7.921,14.304 9.097,14.304 9.558,13.843 v1(9.652,13.843) ; SW1.6@9.003,34.194 9.623,34.814 9.86,34.814 10.246,35.2 10.33,35.2 10.687,35.557 SW1.4
TX: MCU.12 UART.2 | length 22.9
  Top Layer w0.2: UART.2 1.27,20.911 1.734,20.911 2.267,21.444 2.267,22.879 1.716,23.43 v1(1.716,23.495) ; v1(18.669,24.13) MCU.12
  Bottom Layer w0.2: v1(1.716,23.495) 1.716,23.603 1.998,23.885 1.998,23.92 2.208,24.13 v1(18.669,24.13)
UD+: UART.5 USBC.A6 USBC.B6 | length 55.2
  Top Layer w0.2: UART.5 1.405,16.891 3.429,14.867 3.429,12.279 3.048,11.898 v1(3.048,11.811)
  Bottom Layer w0.2: v1(3.048,11.811) 3.048,11.875 3.511,12.338 7.418,12.338 7.926,12.846 11.91,12.846 13.453,11.303 17.907,11.303 21.209,14.605 21.209,25.781 21.066,25.924 21.066,33.307 20.963,33.41 USBC.B6 20.913,34.318 20.913,34.842 20.737,35.018 19.989,35.018 19.431,35.576 19.431,35.898 19.431,35.944 19.513,36.642 19.933,37.579 20.241,38.227 21.028,38.227 21.513,37.742 21.513,36.535 21.513,36.118 USBC.A6
UD-: UART.6 USBC.A7 USBC.B7 | length 49.8
  Top Layer w0.2: UART.6 1.405,15.621 2.286,14.74 2.286,11.43 v1(2.921,10.795)
  Bottom Layer w0.2: v1(2.921,10.795) 5.334,10.795 6.477,11.938 7.584,11.938 8.092,12.446 11.43,12.446 12.973,10.903 18.65,10.903 21.952,14.205 21.952,27.837 21.466,28.323 21.466,33.473 21.463,33.476 USBC.B7 21.413,34.318 21.413,34.908 20.963,35.358 USBC.A7
VBUS: R8.2 USBC.A4 USBC.A9 USBC.B4 USBC.B9 | length 46
  Top Layer w0.2: v1(20.828,37.465) 20.066,36.703 v1(20.066,32.893) 20.13,32.829 22.288,32.829 v1(22.352,32.766)
  Bottom Layer w0.2: USBC.B4 20.013,34.218 20.013,32.946 v1(20.066,32.893) ; USBC.A9 20.013,36.118 20.013,36.65 v1(20.828,37.465) ; USBC.A4 USBC.B9 22.413,34.218 22.413,32.827 v1(22.352,32.766) 22.733,32.385 22.733,13.716 20.066,11.049 20.066,9.07 22.842,6.294 22.842,5.207 R8.2
"VCC TP": C5.1 CM.4 CM.8 PF.1 | length 23.7
  Top Layer w0.254: PF.1 PF.1@24.472,10.668 ; CM.8 27.613,15.61 27.613,13.809 PF.1@24.472,10.668 ; CM.4 31.496,10.048 32.908,8.636 32.908,6.492 31.495,5.079 29.554,5.079 28.702,5.931 C5.1 28.702,6.261 25.095,9.868 25.095,10.045 PF.1@24.472,10.668
pads on no net: CM.6 CM.7 DW.4 FC.8 MCU.2 MCU.3 MCU.5 SW1.2 SW1.5 UART.7 UART.8 UART.9 UART.10 UART.11 UART.12 UART.13 UART.14 UART.15 USBC. USBC.17 USBC.A8 USBC.B8

## Polygon pours and split planes (outlines as drawn)
GND on Bottom Layer "GND_L02_P000" (solid, pour order 0): 0,3.175 35,3.175 35,32.258 0,32.258
GND on Bottom Layer "GND_L02_P001" (solid, pour order 1): 5.282,40 30.353,40 30.353,31.623 26.924,31.623 26.67,31.877 5.207,31.877

## Silkscreen, mask and mechanical layers (free items; w line width, h text height)
Top Overlay:
  text "+" at 0.254,6.477 h1.52
  text "-" at 1.524,4.445 h1.52 r90
Bottom Overlay:
  text "-" at 23.114,18.288 h1.52 r90
  text "+" at 23.114,13.97 h1.52 r90